# Altium PCB Merge_ESC_Board.PcbDoc
Units mil, origin at the board's own origin, x right, y up, seen from the top; angles counter-clockwise.
Board outline 5500 x 4000 mil, 2 copper layers (Top Layer, Bottom Layer); 59 components, 37 nets, 275 pads, 32 vias.
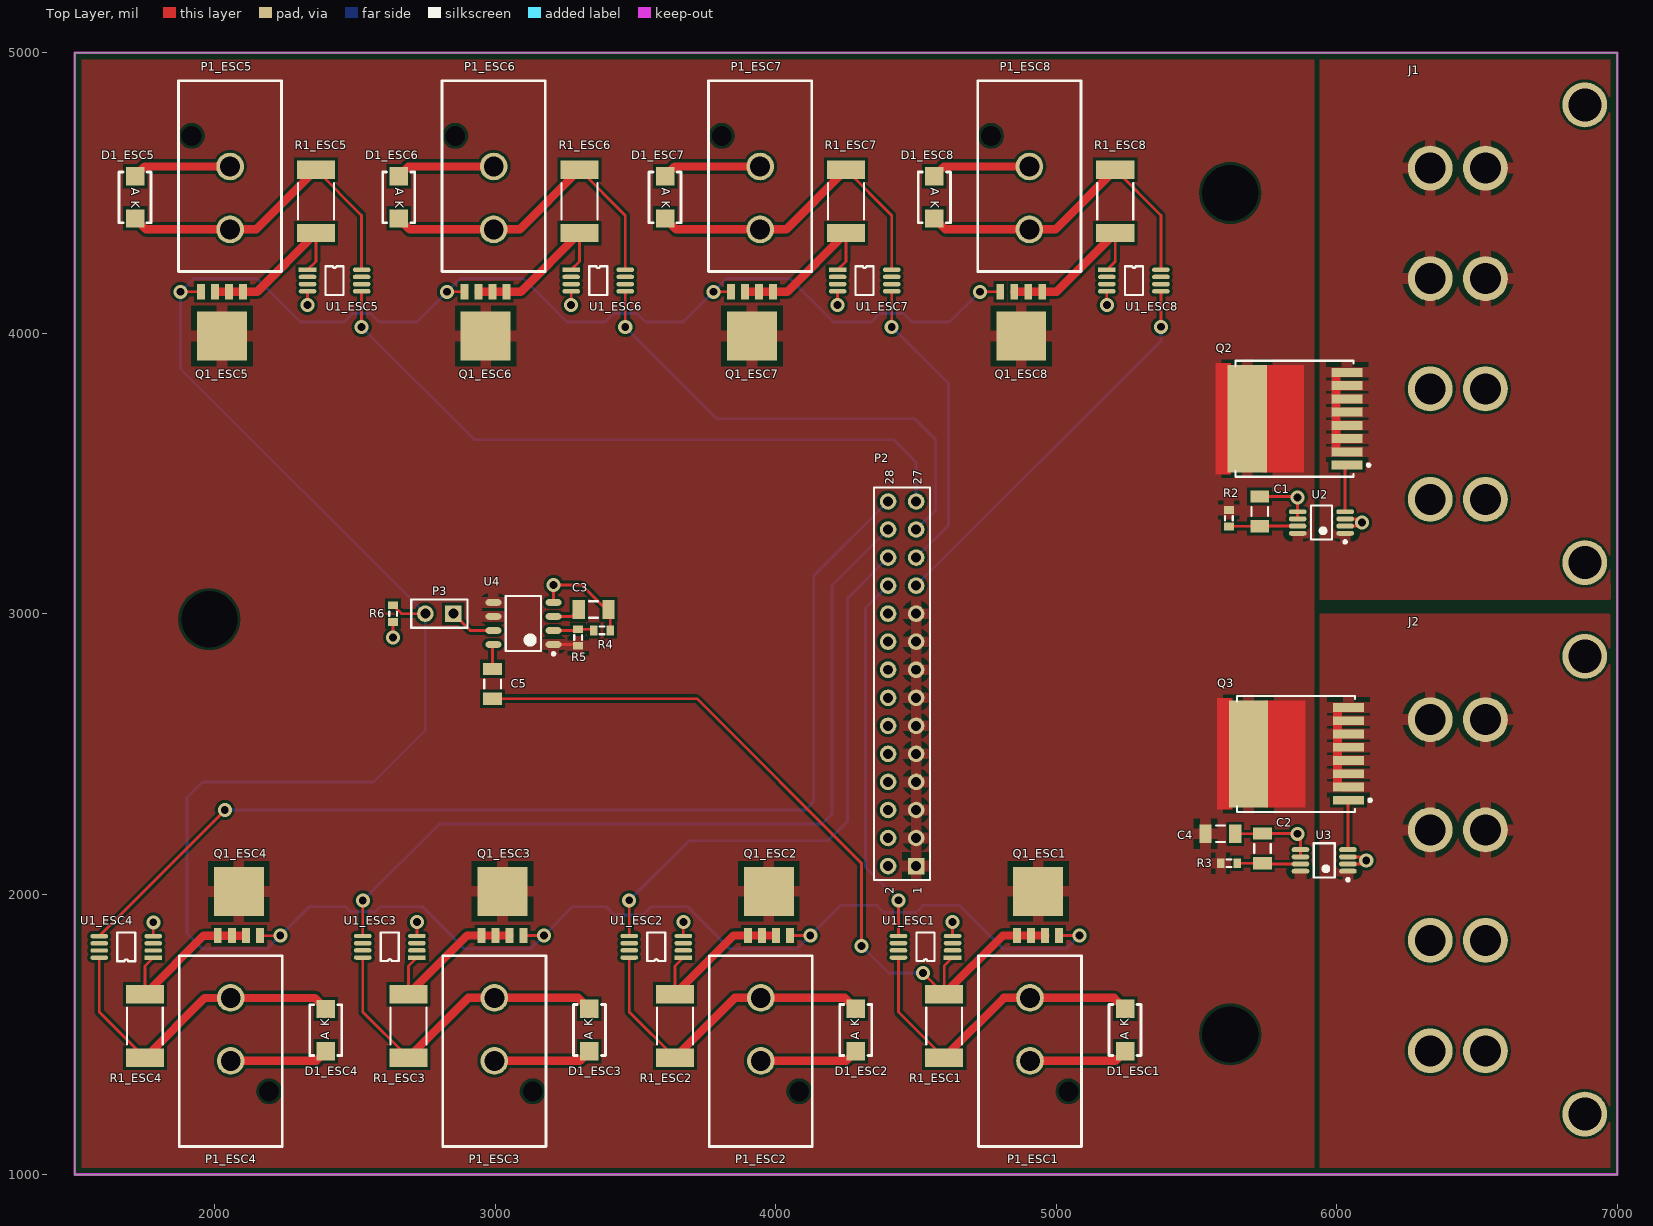
[diagram p0: Top Layer view]
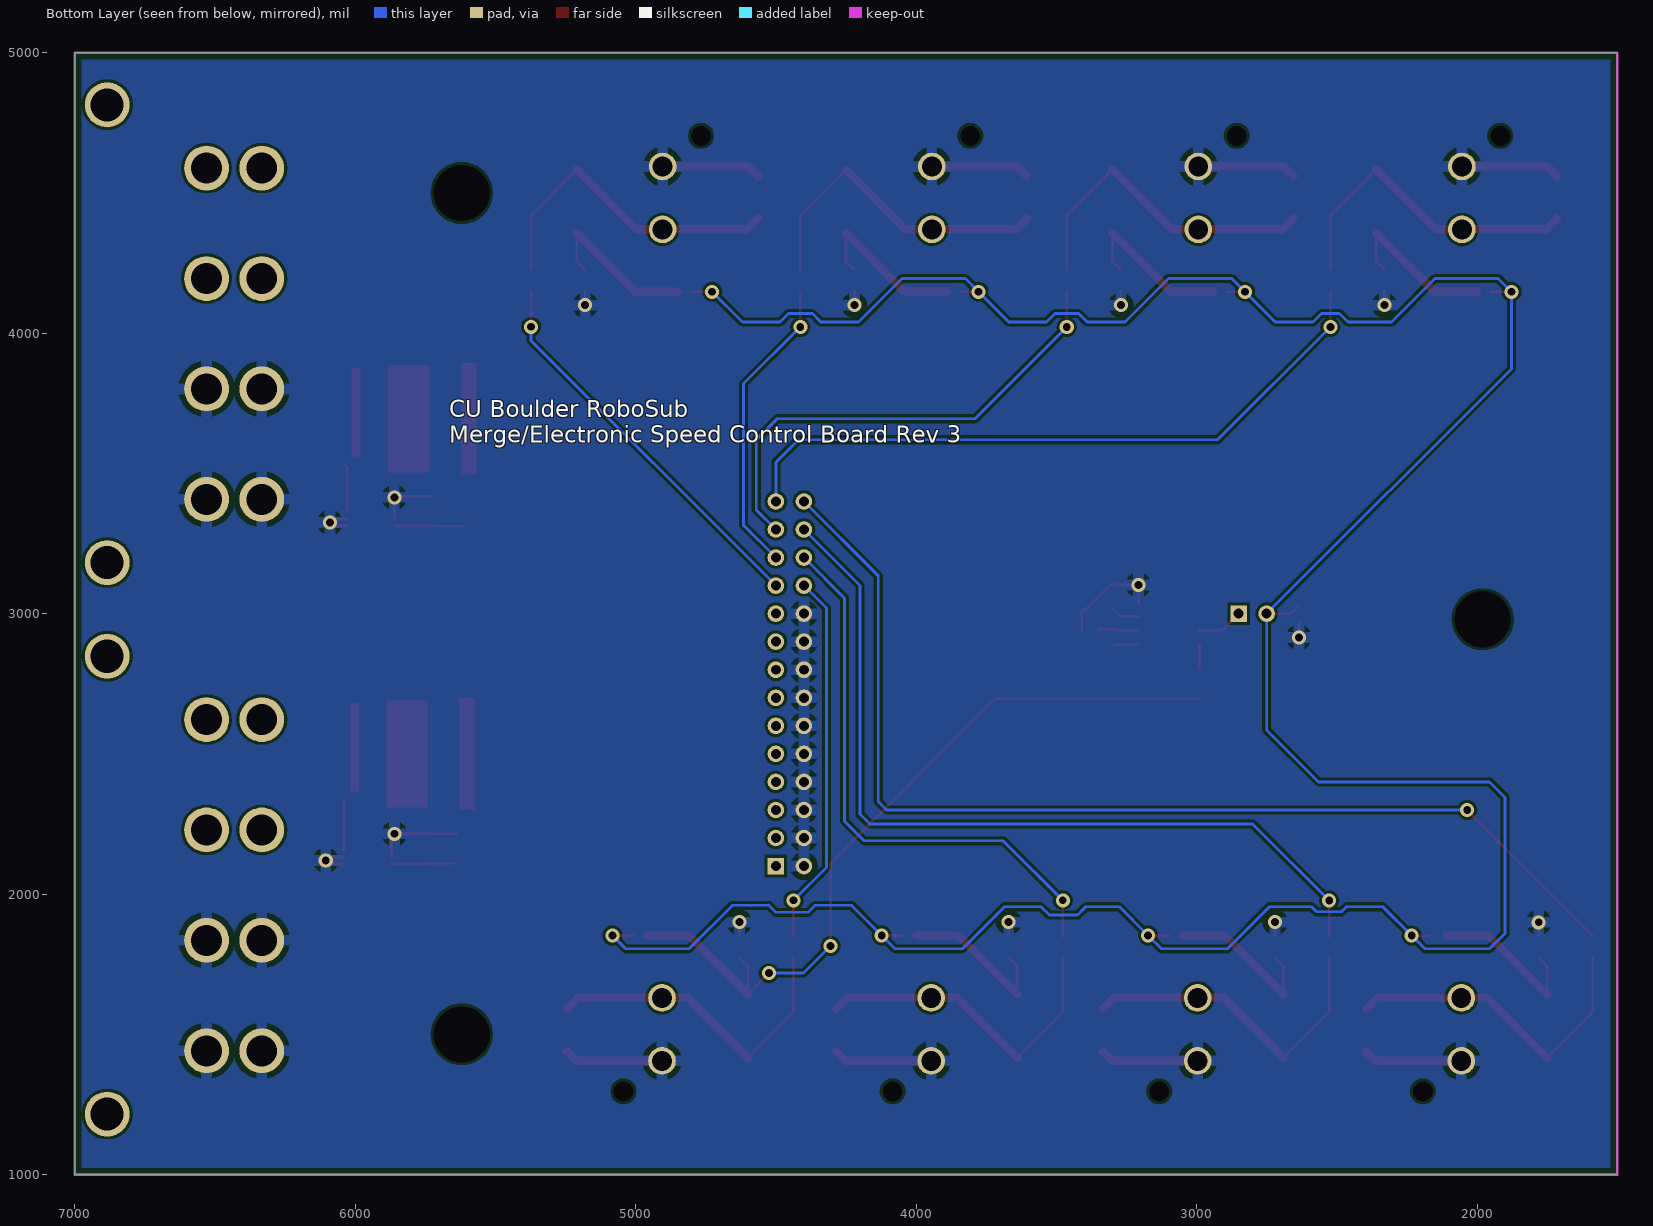
[diagram p1: Bottom Layer view, seen from below]

## Layer stack, top to bottom
Top Solder: solder mask 0.4, Solder Resist, Dk 3.5
Top Layer: signal copper 1.4
Dielectric 1: dielectric 12.6, FR-4, Dk 4.8
Bottom Layer: signal copper 1.4
Bottom Solder: solder mask 0.4, Solder Resist, Dk 3.5

## Board outline
1500,1000 7000,1000 7000,5000 4020,5000 1500,5000

## Design rules (kind name [scope] priority, off if disabled: settings)
Clearance [All] p1: gap=10 ignorepadtopadclearanceinfootprint=FALSE except(5: Arc-SMDPad Track-SMDPad SMDPad-SMDPad SMDPad-THPad)
PlaneConnect [All] p1: planeconnectstyle=Relief reliefexpansion=50 reliefentries=4 reliefconductorwidth=40 reliefairgap=10
PolygonConnect [All] p1: connectstyle=Relief reliefconductorwidth=40 reliefentries=4 polygonreliefangle="90 Angle" airgapwidth=20
RoutingVias [All] p1: holewidth=28 width=50 viastyle="Through Hole" minholewidth=28 minwidth=50 maxholewidth=28 maxwidth=50
SolderMaskExpansion [All] p1: expansion=3
Width [All] p1: maxlimit=30 minlimit=10 preferedwidth=10
29 further rules are at their usual default settings.

## Classes and differential pairs
component class ESC1: D1_ESC1 P1_ESC1 Q1_ESC1 R1_ESC1 U1_ESC1
component class ESC2: D1_ESC2 P1_ESC2 Q1_ESC2 R1_ESC2 U1_ESC2
component class ESC3: D1_ESC3 P1_ESC3 Q1_ESC3 R1_ESC3 U1_ESC3
component class ESC4: D1_ESC4 P1_ESC4 Q1_ESC4 R1_ESC4 U1_ESC4
component class ESC5: D1_ESC5 P1_ESC5 Q1_ESC5 R1_ESC5 U1_ESC5
component class ESC6: D1_ESC6 P1_ESC6 Q1_ESC6 R1_ESC6 U1_ESC6
component class ESC7: D1_ESC7 P1_ESC7 Q1_ESC7 R1_ESC7 U1_ESC7
component class ESC8: D1_ESC8 P1_ESC8 Q1_ESC8 R1_ESC8 U1_ESC8
component class Merge_ESC_Board: C1 C2 C3 C4 C5 J1 J2 P2 P3 Q2 Q3 R2 R3 R4 R5 R6 U2 U3 U4
net class ADC[1..8]: ADC1 ADC2 ADC3 ADC4 ADC5 ADC6 ADC7 ADC8
channel class ESC_Header: ESC1 ESC2 ESC3 ESC4 ESC5 ESC6 ESC7 ESC8

## Components (designator, comment, footprint, x,y, rotation, side; value= is the part's Value field where it differs from the comment)
C1 "Cap Semi" C1206 5725,3365 r270 top value=1uF
C2 "Cap Semi" C1206 5735,2163.15 r270 top value=1uF
C3 "Cap Semi" C1206 3350,3015 r180 top value=2.7nF
C4 "Cap Semi" C1206 5585,2215 r0 top value=10uF
C5 "Cap Semi" C1206 2990,2750 r90 top value=2.7nF
D1_ESC1 "1N5822" 1N58xx 5245,1440 r90 top (schematic designator D1)
D1_ESC2 "1N5822" 1N58xx 4285,1440 r90 top (schematic designator D1)
D1_ESC3 "1N5822" 1N58xx 3335,1440 r90 top (schematic designator D1)
D1_ESC4 "1N5822" 1N58xx 2395.15,1439.54 r90 top (schematic designator D1)
D1_ESC5 "1N5822" 1N58xx 1715,4560 r270 top (schematic designator D1)
D1_ESC6 "1N5822" 1N58xx 2655,4560 r270 top (schematic designator D1)
D1_ESC7 "1N5822" 1N58xx 3605,4560 r270 top (schematic designator D1)
D1_ESC8 "1N5822" 1N58xx 4565,4560 r270 top (schematic designator D1)
J1 "Molex42820-4224" Molex42820-4224 6530,3407.6 r90 top
J2 "Molex42820-4224" Molex42820-4224 6530,1441.3 r90 top
P1_ESC1 "Motor ?" 76829-0102 5090,1780 r180 top (schematic designator P1)
P1_ESC2 "Motor ?" 76829-0102 4130,1780 r180 top (schematic designator P1)
P1_ESC3 "Motor ?" 76829-0102 3180,1780 r180 top (schematic designator P1)
P1_ESC4 "Motor ?" 76829-0102 2240,1780 r180 top (schematic designator P1)
P1_ESC5 "Motor ?" 76829-0102 1870,4220 r0 top (schematic designator P1)
P1_ESC6 "Motor ?" 76829-0102 2810,4220 r0 top (schematic designator P1)
P1_ESC7 "Motor ?" 76829-0102 3760,4220 r0 top (schematic designator P1)
P1_ESC8 "Motor ?" 76829-0102 4720,4220 r0 top (schematic designator P1)
P2 "Header 14X2" HDR2X14 4500,2100 r90 top
P3 "Header 2" HDR1X2 2850,3000 r180 top
Q1_ESC1 "CSD16570Q5B" CSD16570Q5B 4860,1852.28 r270 top (schematic designator Q1)
Q1_ESC2 "CSD16570Q5B" CSD16570Q5B 3900,1852.28 r270 top (schematic designator Q1)
Q1_ESC3 "CSD16570Q5B" CSD16570Q5B 2950,1852.28 r270 top (schematic designator Q1)
Q1_ESC4 "CSD16570Q5B" CSD16570Q5B 2010.15,1851.82 r270 top (schematic designator Q1)
Q1_ESC5 "CSD16570Q5B" CSD16570Q5B 2100,4147.72 r90 top (schematic designator Q1)
Q1_ESC6 "CSD16570Q5B" CSD16570Q5B 3040,4147.72 r90 top (schematic designator Q1)
Q1_ESC7 "CSD16570Q5B" CSD16570Q5B 3990,4147.72 r90 top (schematic designator Q1)
Q1_ESC8 "CSD16570Q5B" CSD16570Q5B 4950,4147.72 r90 top (schematic designator Q1)
Q2 "IPT004N03L" INF-PG-HSOF-8-1_V 5830,3695 r180 top
Q3 "IPT004N03L" INF-PG-HSOF-8-1_V 5835,2500 r180 top
R1_ESC1 "HCS2512" HSC2512xxxL300 4600,1530 r270 top value=0.3m (schematic designator R1)
R1_ESC2 "HCS2512" HSC2512xxxL300 3640,1530 r270 top value=0.3m (schematic designator R1)
R1_ESC3 "HCS2512" HSC2512xxxL300 2690,1530 r270 top value=0.3m (schematic designator R1)
R1_ESC4 "HCS2512" HSC2512xxxL300 1750.15,1529.54 r270 top value=0.3m (schematic designator R1)
R1_ESC5 "HCS2512" HSC2512xxxL300 2360,4470 r90 top value=0.3m (schematic designator R1)
R1_ESC6 "HCS2512" HSC2512xxxL300 3300,4470 r90 top value=0.3m (schematic designator R1)
R1_ESC7 "HCS2512" HSC2512xxxL300 4250,4470 r90 top value=0.3m (schematic designator R1)
R1_ESC8 "HCS2512" HSC2512xxxL300 5210,4470 r90 top value=0.3m (schematic designator R1)
R2 "Res3" J1-0603 5615,3340 r90 top value=100
R3 "Res3" J1-0603 5615.47,2110 r180 top value=100
R4 "Res3" J1-0603 3380,2940 r180 top value=100k
R5 "Res3" J1-0603 3295,2915 r270 top value=100k
R6 "Res3" J1-0603 2635,3000 r90 top value=100k
U1_ESC1 "AD8217" AD8217 4630,1773.82 r180 top (schematic designator U1)
U1_ESC2 "AD8217" AD8217 3670,1773.82 r180 top (schematic designator U1)
U1_ESC3 "AD8217" AD8217 2720,1773.82 r180 top (schematic designator U1)
U1_ESC4 "AD8217" AD8217 1780.15,1773.35 r180 top (schematic designator U1)
U1_ESC5 "AD8217" AD8217 2330,4226.18 r0 top (schematic designator U1)
U1_ESC6 "AD8217" AD8217 3270,4226.18 r0 top (schematic designator U1)
U1_ESC7 "AD8217" AD8217 4220,4226.18 r0 top (schematic designator U1)
U1_ESC8 "AD8217" AD8217 5180,4226.18 r0 top (schematic designator U1)
U2 "LTC4357CMS8#PBF" LT-MS8-8_N 5945,3325 r180 top
U3 "LTC4357CMS8#PBF" LT-MS8-8_N 5955,2120 r180 top
U4 "MIC5021" MIC5021 3100,2965 r180 top

## Footprints (in the part's own frame and the unit in brackets; to place one, negate y for a bottom-side part, rotate by r counter-clockwise, add the part's x,y. Pads: shape width x height; smd on the part's side, far side on the other; paste and mask are expansions set on the pad)
1N58xx [mm] "1A Schottky Barrier Rectifier Diode"
  rect 1.655x1.67 smd: A(0,0) K(3.83,0)
  silkscreen extent -0.39,-1.45 4.22,1.45
76829-0102 [mm] "molex 2 circuit connector megafit slim"
  round 2.5 hole 1.8 mask+0.3: 1(4.67,3.81) 2(4.67,9.51)
  round 0 hole 1.8 unplated: ""(1.19,12.28)
  silkscreen extent 0,0 9.34,17.28, body extent 0.5,0.5 8.85,14.54, height 16.95
AD8217 [mm] "High Resolution, Zero-Drift Current Shunt Monitor"
  rect 1.6x0.4 smd: 1(0,0)
  oval 1.6x0.4 smd: 2(0,-0.65) 3(0,-1.3) 4(0,-1.95) 5(4.9,-1.95) 6(4.9,-1.3) 7(4.9,-0.65) 8(4.9,0)
  silkscreen extent 1.63,-2.28 3.27,0.33
C1206 [mm] "Chip Capacitor, Body 3.2x1.6mm, IPC High Density"
  rect 1.1x1.7 smd: 1(-1.35,0) 2(1.35,0)
  silkscreen extent -0.4,-0.75 0.4,0.75, body extent -1.7,-0.9 1.7,0.9, height 1.3
CSD16570Q5B [mm] "MOSFET N-CH 25V 100A 8VSON"
  rect 4.44x4.52 smd: D(-4.006,1.905)
  rect 1.372x0.71 smd: G(0,3.81) S(0,2.54) S(0,1.27) S(0,0)
HDR1X2 [mm] "Connector; Header; 2 Position"
  rect 1.5x1.5 hole 0.9: 1(0,0)
  round 1.5 hole 0.9: 2(2.54,0)
  silkscreen extent -1.27,-1.27 3.81,1.27
HDR2X14 [mm] "Connector; Header; 14x2 Position"
  rect 1.5x1.5 hole 0.9: 1(0,0)
  round 1.5 hole 0.9: 2(0,2.54) 3(2.54,0) 4(2.54,2.54) 5(5.08,0) 6(5.08,2.54) 7(7.62,0) 8(7.62,2.54) 9(10.16,0) 10(10.16,2.54) 11(12.7,0) 12(12.7,2.54) 13(15.24,0) 14(15.24,2.54) 15(17.78,0) 16(17.78,2.54) 17(20.32,0) 18(20.32,2.54) 19(22.86,0) 20(22.86,2.54) 21(25.4,0) 22(25.4,2.54) 23(27.94,0) 24(27.94,2.54) 25(30.48,0) 26(30.48,2.54) 27(33.02,0) 28(33.02,2.54)
  silkscreen extent -1.27,-1.27 34.29,3.81
HSC2512xxxL300 [mm] "Chip Resistor, 2-Leads, Body 6.50x3.25mm, IPC Medium Density"
  rect 1.65x3.45 smd: 1(-2.875,0) 2(2.875,0)
  silkscreen extent -1.65,-1.63 1.65,1.63, body extent -3.35,-1.73 3.35,1.73, height 1.32
INF-PG-HSOF-8-1_V [mm]
  rect 2.8x0.8 smd: 1(-5.249,4.2) 2(-5.249,3) 3(-5.249,1.8) 4(-5.249,0.6) 5(-5.249,-0.6) 6(-5.249,-1.8) 7(-5.249,-3) 8(-5.249,-4.2)
  rect 3.556x9.703 smd: 9(3.8,0)
  Top Layer region: -4.65,3.4 -4.65,-4.6 -3.85,-4.6 -3.85,3.4
  Top Layer region: 5.25,5.05 5.25,-5.05 6.65,-5.05 6.65,5.05
  Top Layer region: -1.35,4.85 -1.35,-4.85 2.35,-4.85 2.35,4.85
  silkscreen extent -7.32,-5.25 4.85,5.25, body extent -5.84,-4.95 5.84,4.95, height 2.4
J1-0603 [mm] "Chip Resistor, Body 1.6x0.8mm, IPC High Density"
  rect 0.7x0.9 smd: 1(-0.75,0) 2(0.75,0)
  silkscreen extent -0.2,-0.35 0.2,0.35, body extent -0.85,-0.48 0.85,0.48, height 0.9
LT-MS8-8_N [mm] "Positive High Voltage Ideal Diode Controller, 9 to 80 V Vin, 8-pin SOP (MS8-8), 0 to 70 degC, Pb-Free"
  oval 1.6x0.45 smd: 1(-2.15,0.975) 2(-2.15,0.325) 3(-2.15,-0.325) 4(-2.15,-0.975) 5(2.15,-0.975) 6(2.15,-0.325) 7(2.15,0.325) 8(2.15,0.975)
  silkscreen extent -2.28,-1.55 0.95,1.87, body extent -1.55,-1.55 1.55,1.55, height 1.1
MIC5021 [mm] "SOIC, 8-Leads, Body 4.89x3.90mm, Pitch 1.27mm, IPC Medium Density"
  oval 1.45x0.6 smd: 1(-2.725,1.905) 2(-2.725,0.635) 3(-2.725,-0.635) 4(-2.725,-1.905) 5(2.725,-1.905) 6(2.725,-0.635) 7(2.725,0.635) 8(2.725,1.905)
  silkscreen extent -2.85,-2.5 1.6,2.88, body extent -2,-2.5 2,2.5, height 1.73
Molex42820-4224 [mm]
  round 4.064 hole 2.8: 1(0,5) 1(0,0) 2(10,0) 2(10,5) 3(20,0) 3(20,5) 4(30,0) 4(30,5)
  round 4.064 hole 3 unplated: ""(-5.73,-9) ""(35.73,-9)
  body extent -6.92,-22.62 36.9,5.98, height 15

## Part data
C1 C2 C3 C4 C5: "Capacitor (Semiconductor SIM Model)", LatestRevisionDate=29-May-2009, LatestRevisionNote="IPC-7351 Footprint Added.", PackageDescription="Chip Capacitor", PackageReference=C1206, Published=8-Jun-2000, Publisher="Altium Limited"
D1_ESC1 D1_ESC2 D1_ESC3 D1_ESC4 D1_ESC5 D1_ESC6 D1_ESC7 D1_ESC8: library part 1N58xx, "1A Schottky Barrier Rectifier Diode", Datasheet=http://www.kesenes.com/pdf/1n5817-1n5819.pdf
J1 J2: Supplier Part Number 1=0428204224-ND, ComponentLink1Description=DataSheet, ComponentLink1URL=https://www.molex.com/pdm_docs/sd/428204224_sd.pdf, Supplier 1=Digi-Key
P1_ESC1 P1_ESC2 P1_ESC3 P1_ESC4 P1_ESC5 P1_ESC6 P1_ESC7 P1_ESC8: library part "Megafit Slim Vert 2 Peg", mfgr_part_num=76829-0102
P2: "Header, 14-Pin, Dual row", LatestRevisionDate=17-Jul-2002, LatestRevisionNote="Re-released for DXP Platform.", Publisher="Altium Limited"
P3: "Header, 2-Pin", LatestRevisionDate=17-Jul-2002, LatestRevisionNote="Re-released for DXP Platform.", Publisher="Altium Limited"
Q1_ESC1 Q1_ESC2 Q1_ESC3 Q1_ESC4 Q1_ESC5 Q1_ESC6 Q1_ESC7 Q1_ESC8: "MOSFET N-CH 25V 100A 8VSON", Manufacturer="Texas Instruments", Supplier Part Number 1=296-47753-1-ND, ComponentLink1Description="Manufacturer URL", ComponentLink1URL=http://www.ti.com/, ComponentLink2Description=Datasheet, ComponentLink2URL=http://www.ti.com/lit/ds/symlink/csd16570q5b.pdf, Digikey Link=https://www.digikey.com/product-detail/en/texas-instruments/CSD16570Q5B/296-47753-1-ND/8133102, ID (max)="100 A", Mounting Technology="Surface Mount", Packing=Reel, PartNumber=CSD16570Q5B, QG="250 nC", RDS (on) (max)="0.59 mOhm", Supplier 1=Digikey, VDS (max)="25 V", VGS (max)="20 V", VGS(th) (max)="1.9 V"
Q2 Q3: "N-Channel OptiMOS(TM) Power-MOSFET, 30 V VDS, 300 A ID, -55 to 175 degC, PG-HSOF-8, Reel, Green", Manufacturer=Infineon, Supplier Part Number 1=N/A, ComponentLink1Description="Manufacturer URL", ComponentLink1URL=http://www.infineon.com/, ComponentLink2Description=Datasheet, ComponentLink2URL=http://www.infineon.com/dgdl/IPT004N03L_rev1.2.pdf?folderId=db3a304313b8b5a60113cee8763b02d7&fileId=db3a30433e9d5d11013e9e0f382600c2, ComponentLink3Description="Package Specification", ComponentLink3URL=http://www.infineon.com/cms/packages/SMD_-_Surface_Mounted_Devices/P-PG-HSOF/P-PG-HSOF-08-1.html?__locale=en, DatasheetVersion="Rev. 1.2", Green=TRUE, Halogen-free=TRUE, ID (max)="300 A", IDpuls (max)="1,200 A", Mounting Technology="Surface Mount", PackageDescription="8-Pin Plastic (Green) Heatlink Small Outline Flat Leads Package, 10.375 x 9.9 mm Body, 0.8 mm Pitch", PackageReference=PG-HSOF-8-1, PackageVersion="Rev. 04", Packing=Reel, PartNumber=IPT004N03L, Polarity=FALSE, Ptot (max)="300 W", QG="122 nC", RDS (on) (max)="0.4 mOhm", RthJA (max)="40 K/W", RthJC (max)="0.5 K/W", Supplier 1=Mouser, Technology=OptiMOS(TM), VDS (max)="30 V", VGS(th) (max)="2.2 V", VGS(th) (min)="0.7 V"
R1_ESC1 R1_ESC2 R1_ESC3 R1_ESC4 R1_ESC5 R1_ESC6 R1_ESC7 R1_ESC8: library part HCS2512FTL300, "300 µOhms ±1% 3W Chip Resistor 2512 (6432 Metric) Automotive AEC-Q200, Current Sense, Moisture Resistant Metal Foil", Datasheet=https://www.seielect.com/catalog/sei-hcs.pdf, Digikey=https://www.digikey.com/product-detail/en/stackpole-electronics-inc/HCS2512FTL300/HCS2512FTL300CT-ND/4517526
R2 R3 R4 R5 R6: "Resistor", LatestRevisionDate=29-May-2009, LatestRevisionNote="IPC-7351 Footprint Added.", PackageDescription="Chip Resistor", PackageReference=J1-0603, Published=8-Jun-2000, Publisher="Altium Limited"
U1_ESC1 U1_ESC2 U1_ESC3 U1_ESC4 U1_ESC5 U1_ESC6 U1_ESC7 U1_ESC8: "High Resolution, Zero-Drift  Current Shunt Monitor", Datasheet=https://www.analog.com/media/en/technical-documentation/data-sheets/AD8217.pdf
U2 U3: "Positive High Voltage Ideal Diode Controller, 9 to 80 V Vin, 8-pin SOP (MS8-8), 0 to 70 degC, Pb-Free", Manufacturer="Linear Technology", Supplier Part Number 1=LTC4357CMS8#PBF-ND, ComponentLink1Description="Manufacturer URL", ComponentLink1URL=http://www.linear.com/, ComponentLink2Description=Datasheet, ComponentLink2URL=http://cds.linear.com/docs/en/datasheet/4357fd.pdf, ComponentLink3Description="Package Specification", ComponentLink3URL=http://cds.linear.com/docs/en/packaging/05081660_G_MS8.pdf, DatasheetVersion="Rev. D", Ideal Diode="Single, External, N-Channel", Mounting Technology="Surface Mount", PackageDescription="8-Pin Plastic MSOP, Body 3 x 3 mm, Pitch 0.65 mm", PackageReference=MS8-8, PackageVersion="Rev. G, 03/2012", PartNumber=LTC4357CMS8#PBF, RoHS=TRUE, Supplier 1=Digi-Key, Supplier 2=Farnell, Supplier 3=Newark, Supplier Part Number 2=1432779, Supplier Part Number 3=56M9468
U4: Datasheet Link=http://ww1.microchip.com/downloads/en/DeviceDoc/20005677A.pdf, Digikey Link=https://www.digikey.com/product-detail/en/microchip-technology/MIC5021YM-TR/576-1239-1-ND/771878

## Free pads (board coordinates)
  round 60 hole 200 unplated: ""(1980,2980) ""(5620,1500) ""(5620,4500)

## Via types
v1: diameter 50, hole 28, Top Layer to Bottom Layer, 32 vias

## Nets (pads, with @x,y where several pads share a name; then routed paths per layer and width w, separated by ;. In a path a pad name is that pad's centre, name@x,y a point inside that pad or via, vN(x,y) a via of type N, cw(c..) or ccw(c..) an arc to the next point about the centre after c; other vN are vias at no path point)
ADC1: P2.22 U1_ESC1.5 | length 1331
  Top Layer w10: U1_ESC1.5 v1(4437.09,1977.91)
  Bottom Layer w10: P2.22 4320,3020 4320,2095 v1(4437.09,1977.91)
ADC2: P2.24 U1_ESC2.5 | length 2022.1
  Top Layer w10: U1_ESC2.5 v1(3477.09,1977.91)
  Bottom Layer w10: v1(3477.09,1977.91) 3689.17,2190 4185,2190 4255,2260 4255,3055 P2.24
ADC3: P2.26 U1_ESC3.5 | length 3024.8
  Top Layer w10: U1_ESC3.5 v1(2527.09,1977.09)
  Bottom Layer w10: v1(2527.09,1977.09) 2800,2250 4165,2250 4200,2285 4200,3100 P2.26
ADC4: P2.28 U1_ESC4.5 | length 3927.5
  Top Layer w10: U1_ESC4.5 2035,2297.89 v1(2035,2300)
  Bottom Layer w10: v1(2035,2300) 4105,2300 4135,2330 4135,3135 P2.28
ADC5: P2.27 U1_ESC5.5 | length 2444.1
  Top Layer w10: v1(2522.91,4022.09) U1_ESC5.5
  Bottom Layer w10: v1(2522.91,4022.09) 2925,3620 4420,3620 4500,3540 P2.27
ADC6: P2.25 U1_ESC6.5 | length 1750
  Top Layer w10: v1(3462.91,4022.09) U1_ESC6.5
  Bottom Layer w10: v1(3462.91,4022.09) 3790,3695 4495,3695 4570,3620 4570,3370 P2.25
ADC7: P2.23 U1_ESC7.5 | length 1080.8
  Top Layer w10: v1(4412.91,4022.09) U1_ESC7.5
  Bottom Layer w10: v1(4412.91,4022.09) 4615,3820 4615,3315 P2.23
ADC8: P2.21 U1_ESC8.5 | length 1411
  Top Layer w10: v1(5372.91,4022.91) U1_ESC8.5
  Bottom Layer w10: P2.21 5372.91,3972.91 v1(5372.91,4022.91)
GND: C1.1 C2.1 C3.1 C4.2 D1_ESC1.A D1_ESC2.A D1_ESC3.A D1_ESC4.A D1_ESC5.A D1_ESC6.A D1_ESC7.A D1_ESC8.A J1.1 J1.2 J2.1 J2.2 P1_ESC1.2 P1_ESC2.2 P1_ESC3.2 P1_ESC4.2 P1_ESC5.2 P1_ESC6.2 P1_ESC7.2 P1_ESC8.2 P2.2 P2.4 P2.6 P2.8 P2.10 P2.12 P2.14 P2.16 P2.18 P2.20 R4.1 R6.1 U1_ESC1.4 U1_ESC2.4 U1_ESC3.4 U1_ESC4.4 U1_ESC5.4 U1_ESC6.4 U1_ESC7.4 U1_ESC8.4 U2.2 U2.3 U2.5 U2.6 U3.2 U3.3 U3.5 U3.6 U4.4 | length 4447.1
  Top Layer w10: U1_ESC4.4 v1(1780.15,1899.54) ; v1(2330,4100) U1_ESC5.4 ; v1(2635,2915) R6.1 ; U1_ESC3.4 v1(2720,1900) ; v1@3204.57,3105 v1(3207.28,3102.28) ; U4.4 v1(3207.28,3102.28) ; v1(3270,4100) U1_ESC6.4 ; R4.1 3409.53,3008.62 C3.1 3395,3015 3307.72,3102.28 v1(3207.28,3102.28) ; U1_ESC2.4 v1(3670,1900) ; v1(4220,4100) U1_ESC7.4 ; U1_ESC1.4 v1(4630,1900) ; v1(5180,4100) U1_ESC8.4 ; C4.2 5733.7,2215 C2.1 5858.7,2216.3 v1(5860,2215) 5870.35,2204.65 U3.5 U3.6 ; C1.1 5856.85,3418.15 v1(5860.35,3414.65) U2.5 U2.6 ; U2.2 6077.2,3312.2 v1(6090,3325) 6077.2,3337.8 U2.3 ; U3.2 6092.2,2107.2 v1(6105,2120) 6092.2,2132.8 U3.3
  Top Layer w30: D1_ESC5.A 1749.41,4594.41 P1_ESC5.2 ; P1_ESC4.2@2056.29,1405.13 2360.74,1405.13 D1_ESC4.A ; D1_ESC6.A 2689.41,4594.41 P1_ESC6.2 ; P1_ESC3.2 3300.59,1405.59 D1_ESC3.A ; D1_ESC7.A 3639.41,4594.41 P1_ESC7.2 ; P1_ESC2.2 4250.59,1405.59 D1_ESC2.A ; D1_ESC8.A 4599.41,4594.41 P1_ESC8.2 ; P1_ESC1.2 5210.59,1405.59 D1_ESC1.A
NetC1_2: C1.2 R2.1 U2.7 | length 246.1
  Top Layer w10: R2.1 5616.38,3311.85 C1.2 5725.35,3312.2 U2.7
NetC2_2: C2.2 R3.1 U3.7 | length 226.5
  Top Layer w10: R3.1 C2.2 5737.8,2107.2 U3.7
NetC3_2: C3.2 U4.3 | length 99.9
  Top Layer w10: U4.3 3271.85,2990 C3.2
NetC5_1: C5.1 Q1_ESC1.S R1_ESC1.1 U1_ESC1.1 | length 2808.9
  Top Layer w10: C5.1 3718.15,2696.85 4305,2110 v1(4305,1815) ; v1(4525,1718.19) R1_ESC1.1 4600,1743.82 U1_ESC1.1
  Top Layer w30: R1_ESC1.1 4809.09,1852.28 4860,1852.28 4910,1852.28 Q1_ESC1.S@4960,1852.28
  Bottom Layer w10: v1(4305,1815) 4401.81,1718.19 v1(4525,1718.19)
NetC5_2: C5.2 U4.8 | length 88
  Top Layer w10: C5.2 2990,2887.28 U4.8
NetD1_ESC1_K: D1_ESC1.K P1_ESC1.1 R1_ESC1.2 U1_ESC1.8 | length 1174
  Top Layer w10: U1_ESC1.8 4437.09,1579.72 R1_ESC1.2
  Top Layer w30: R1_ESC1.2 4813.19,1630 P1_ESC1.1 5205.79,1630 D1_ESC1.K
NetD1_ESC2_K: D1_ESC2.K P1_ESC2.1 R1_ESC2.2 U1_ESC2.8 | length 1174
  Top Layer w10: U1_ESC2.8 3477.09,1579.72 R1_ESC2.2
  Top Layer w30: R1_ESC2.2 3853.19,1630 P1_ESC2.1 4245.79,1630 D1_ESC2.K
NetD1_ESC3_K: D1_ESC3.K P1_ESC3.1 R1_ESC3.2 U1_ESC3.8 | length 1174
  Top Layer w10: U1_ESC3.8 2527.09,1579.72 R1_ESC3.2
  Top Layer w30: R1_ESC3.2 2903.19,1630 P1_ESC3.1 3295.79,1630 D1_ESC3.K
NetD1_ESC4_K: D1_ESC4.K P1_ESC4.1 R1_ESC4.2 U1_ESC4.8 | length 1174
  Top Layer w10: U1_ESC4.8 1587.24,1579.26 R1_ESC4.2
  Top Layer w30: R1_ESC4.2 1963.34,1629.54 2355.94,1629.54 D1_ESC4.K
NetD1_ESC5_K: D1_ESC5.K P1_ESC5.1 R1_ESC5.2 U1_ESC5.8 | length 1174
  Top Layer w10: R1_ESC5.2 2522.91,4420.28 U1_ESC5.8
  Top Layer w30: D1_ESC5.K 1754.21,4370 P1_ESC5.1 2146.81,4370 R1_ESC5.2
NetD1_ESC6_K: D1_ESC6.K P1_ESC6.1 R1_ESC6.2 U1_ESC6.8 | length 1174
  Top Layer w10: R1_ESC6.2 3462.91,4420.28 U1_ESC6.8
  Top Layer w30: D1_ESC6.K 2694.21,4370 P1_ESC6.1 3086.81,4370 R1_ESC6.2
NetD1_ESC7_K: D1_ESC7.K P1_ESC7.1 R1_ESC7.2 U1_ESC7.8 | length 1174
  Top Layer w10: R1_ESC7.2 4412.91,4420.28 U1_ESC7.8
  Top Layer w30: D1_ESC7.K 3644.21,4370 P1_ESC7.1 4036.81,4370 R1_ESC7.2
NetD1_ESC8_K: D1_ESC8.K P1_ESC8.1 R1_ESC8.2 U1_ESC8.8 | length 1174
  Top Layer w10: R1_ESC8.2 5372.91,4420.28 U1_ESC8.8
  Top Layer w30: D1_ESC8.K 4604.21,4370 P1_ESC8.1 4996.81,4370 R1_ESC8.2
NetJ1_3: J1.3 J1.4 Q2.2 Q2.3 Q2.4 Q2.5 Q2.6 Q2.7 Q2.8 U2.1
NetJ2_3: J2.3 J2.4 Q3.2 Q3.3 Q3.4 Q3.5 Q3.6 Q3.7 Q3.8 U3.1
NetP3_1: P3.1 U4.7 | length 167.6
  Top Layer w10: P3.1 2910,2940 U4.7
NetP3_2: P3.2 Q1_ESC1.G Q1_ESC2.G Q1_ESC3.G Q1_ESC4.G Q1_ESC5.G Q1_ESC6.G Q1_ESC7.G Q1_ESC8.G R6.2 | length 11019.8
  Top Layer w10: v1(1877.28,4147.72) Q1_ESC5.G ; Q1_ESC4.G v1(2232.87,1851.82) ; R6.2 2664.53,3000 P3.2 ; v1(2827.28,4147.72) Q1_ESC6.G ; Q1_ESC3.G v1(3172.72,1852.28) ; v1(3777.28,4147.72) Q1_ESC7.G ; Q1_ESC2.G v1(4122.72,1852.28) ; v1(4727.28,4147.72) Q1_ESC8.G ; Q1_ESC1.G v1(5082.72,1852.28)
  Bottom Layer w10: v1(4727.28,4147.72) 4619.57,4040 4485,4040 4455,4070 4370,4070 4340,4040 4205,4040 4050,4195 3824.57,4195 v1(3777.28,4147.72) 3669.57,4040 3535,4040 3505,4070 3420,4070 3390,4040 3255,4040 3100,4195 2874.57,4195 v1(2827.28,4147.72) 2719.57,4040 2585,4040 2555,4070 2490,4070 2460,4040 2305,4040 2150,4195 1924.57,4195 v1(1877.28,4147.72) 1877.28,3872.72 P3.2 2750,2585 2565,2400 1955,2400 1900,2345 1900,1860 1955,1805 2186.05,1805 v1(2232.87,1851.82) 2336.05,1955 2465,1955 2482.91,1937.09 2572.09,1937.09 2590,1955 2740,1955 2890,1805 3125.43,1805 v1(3172.72,1852.28) 3275.43,1955 3395,1955 3425,1925 3525,1925 3555,1955 3685,1955 3835,1805 4075.43,1805 v1(4122.72,1852.28) 4230.43,1960 4360,1960 4385,1935 4500,1935 4525,1960 4655,1960 4810,1805 5035.43,1805 v1(5082.72,1852.28)
NetQ1_ESC2_S: Q1_ESC2.S R1_ESC2.1 U1_ESC2.1 | length 589.7
  Top Layer w10: R1_ESC2.1 3640,1743.82 U1_ESC2.1
  Top Layer w30: R1_ESC2.1 3849.09,1852.28 3900,1852.28 3950,1852.28 Q1_ESC2.S@4000,1852.28
NetQ1_ESC3_S: Q1_ESC3.S R1_ESC3.1 U1_ESC3.1 | length 589.7
  Top Layer w10: R1_ESC3.1 2690,1743.82 U1_ESC3.1
  Top Layer w30: R1_ESC3.1 2899.09,1852.28 2950,1852.28 3000,1852.28 Q1_ESC3.S@3050,1852.28
NetQ1_ESC4_S: Q1_ESC4.S R1_ESC4.1 U1_ESC4.1 | length 589.7
  Top Layer w10: R1_ESC4.1 1750.15,1743.35 U1_ESC4.1
  Top Layer w30: R1_ESC4.1 1959.24,1851.82 2010.15,1851.82 2060.15,1851.82 Q1_ESC4.S@2110.15,1851.82
NetQ1_ESC5_S: Q1_ESC5.S R1_ESC5.1 U1_ESC5.1 | length 589.7
  Top Layer w10: U1_ESC5.1 2360,4256.18 R1_ESC5.1
  Top Layer w30: Q1_ESC5.S@2000,4147.72 2050,4147.72 2100,4147.72 2150.91,4147.72 R1_ESC5.1
NetQ1_ESC6_S: Q1_ESC6.S R1_ESC6.1 U1_ESC6.1 | length 589.7
  Top Layer w10: U1_ESC6.1 3300,4256.18 R1_ESC6.1
  Top Layer w30: Q1_ESC6.S@2940,4147.72 2990,4147.72 3040,4147.72 3090.91,4147.72 R1_ESC6.1
NetQ1_ESC7_S: Q1_ESC7.S R1_ESC7.1 U1_ESC7.1 | length 639.7
  Top Layer w10: U1_ESC7.1 4250,4256.18 R1_ESC7.1
  Top Layer w30: Q1_ESC7.S@3940,4147.72 3890,4147.72 3990,4147.72 4040.91,4147.72 R1_ESC7.1
NetQ1_ESC8_S: Q1_ESC8.S R1_ESC8.1 U1_ESC8.1 | length 589.7
  Top Layer w10: U1_ESC8.1 5210,4256.18 R1_ESC8.1
  Top Layer w30: Q1_ESC8.S@4850,4147.72 4900,4147.72 4950,4147.72 5000.91,4147.72 R1_ESC8.1
NetQ2_1: Q2.1 U2.4 | length 169.2
  Top Layer w10: U2.4 6029.65,3522.62 Q2.1
NetQ3_1: Q3.1 U3.4 | length 177
  Top Layer w10: U3.4@6040,2158.39 6040,2332.97 Q3.1
NetR4_2: R4.2 R5.1 U4.2 | length 146.9
  Top Layer w10: U4.2 3290.47,2940 R5.1 3345.94,2944.53 R4.2
VCC: C4.1 P2.1 P2.3 P2.5 P2.7 P2.9 P2.11 P2.13 P2.15 P2.17 P2.19 Q1_ESC1.D Q1_ESC2.D Q1_ESC3.D Q1_ESC4.D Q1_ESC5.D Q1_ESC6.D Q1_ESC7.D Q1_ESC8.D Q2.9 Q3.9 R2.2 R3.2 R5.2 U2.8 U3.8 U4.1 U4.5 U4.6 | length 89.6
  Top Layer w10: U4.1 3290.47,2890 R5.2
pads on no net: J1. J2. P1_ESC1. P1_ESC2. P1_ESC3. P1_ESC4. P1_ESC5. P1_ESC6. P1_ESC7. P1_ESC8. U1_ESC1.2 U1_ESC1.3 U1_ESC1.6 U1_ESC1.7 U1_ESC2.2 U1_ESC2.3 U1_ESC2.6 U1_ESC2.7 U1_ESC3.2 U1_ESC3.3 U1_ESC3.6 U1_ESC3.7 U1_ESC4.2 U1_ESC4.3 U1_ESC4.6 U1_ESC4.7 U1_ESC5.2 U1_ESC5.3 U1_ESC5.6 U1_ESC5.7 U1_ESC6.2 U1_ESC6.3 U1_ESC6.6 U1_ESC6.7 U1_ESC7.2 U1_ESC7.3 U1_ESC7.6 U1_ESC7.7 U1_ESC8.2 U1_ESC8.3 U1_ESC8.6 U1_ESC8.7

## Polygon pours and split planes (outlines as drawn)
VCC on Top Layer "Top Layer-VCC" (solid, pour order 4): 1525,4975 5920,4975 5920,1025 1525,1025
NetJ2_3 on Top Layer "Top Layer J2_3" (solid, pour order 0): 6975.18,3000 5940,3000 5940,1025 6975,1025
NetJ1_3 on Top Layer "Top Layer J1_3" (solid, pour order 2): 6975,4975 5940,4975 5940,4940 5940,3050 6975.94,3050
GND on Bottom Layer "Bottom Layer-GND" (solid, pour order 6): 1525,4975 6975,4975 6975,1025 1525,1025

## Keep-outs
Keep-Out Layer:
  lines w10: 1500,1000 7000,1000 7000,5000 1500,5000 1500,1000

## Silkscreen, mask and mechanical layers (free items; w line width, h text height)
Bottom Overlay:
  text "CU Boulder RoboSub / Merge/Electronic Speed Control Board Rev 3" at 5665,3610 h60

## Text inside footprints (layer, text, board x,y; h text height)
D1_ESC1: Top Overlay "K" at 5257.8,1528.58 h30 r90; Top Overlay "A" at 5257.8,1481.34 h30 r90
D1_ESC2: Top Overlay "K" at 4297.8,1528.58 h30 r90; Top Overlay "A" at 4297.8,1481.34 h30 r90
D1_ESC3: Top Overlay "K" at 3347.8,1528.58 h30 r90; Top Overlay "A" at 3347.8,1481.34 h30 r90
D1_ESC4: Top Overlay "K" at 2407.94,1528.12 h30 r90; Top Overlay "A" at 2407.94,1480.87 h30 r90
D1_ESC5: Top Overlay "K" at 1702.2,4471.42 h30 r270; Top Overlay "A" at 1702.2,4518.66 h30 r270
D1_ESC6: Top Overlay "K" at 2642.2,4471.42 h30 r270; Top Overlay "A" at 2642.2,4518.66 h30 r270
D1_ESC7: Top Overlay "K" at 3592.2,4471.42 h30 r270; Top Overlay "A" at 3592.2,4518.66 h30 r270
D1_ESC8: Top Overlay "K" at 4552.2,4471.42 h30 r270; Top Overlay "A" at 4552.2,4518.66 h30 r270
P2: Top Overlay "28" at 4420,3460 h30 r90; Top Overlay "27" at 4520,3460 h30 r90; Top Overlay "1" at 4520,2000 h30 r90; Top Overlay "2" at 4420,2000 h30 r90